# Altium PCB PCB1.PcbDoc
Units mm, origin at the board's own origin, x right, y up, seen from the top; angles counter-clockwise.
Board outline 38.5 x 62.7 mm, 4 copper layers (Top Layer, Mid Layer 1, Mid Layer 2, Bottom Layer), stack 1.57 mm thick; 33 components, 31 nets, 138 pads, 57 vias.
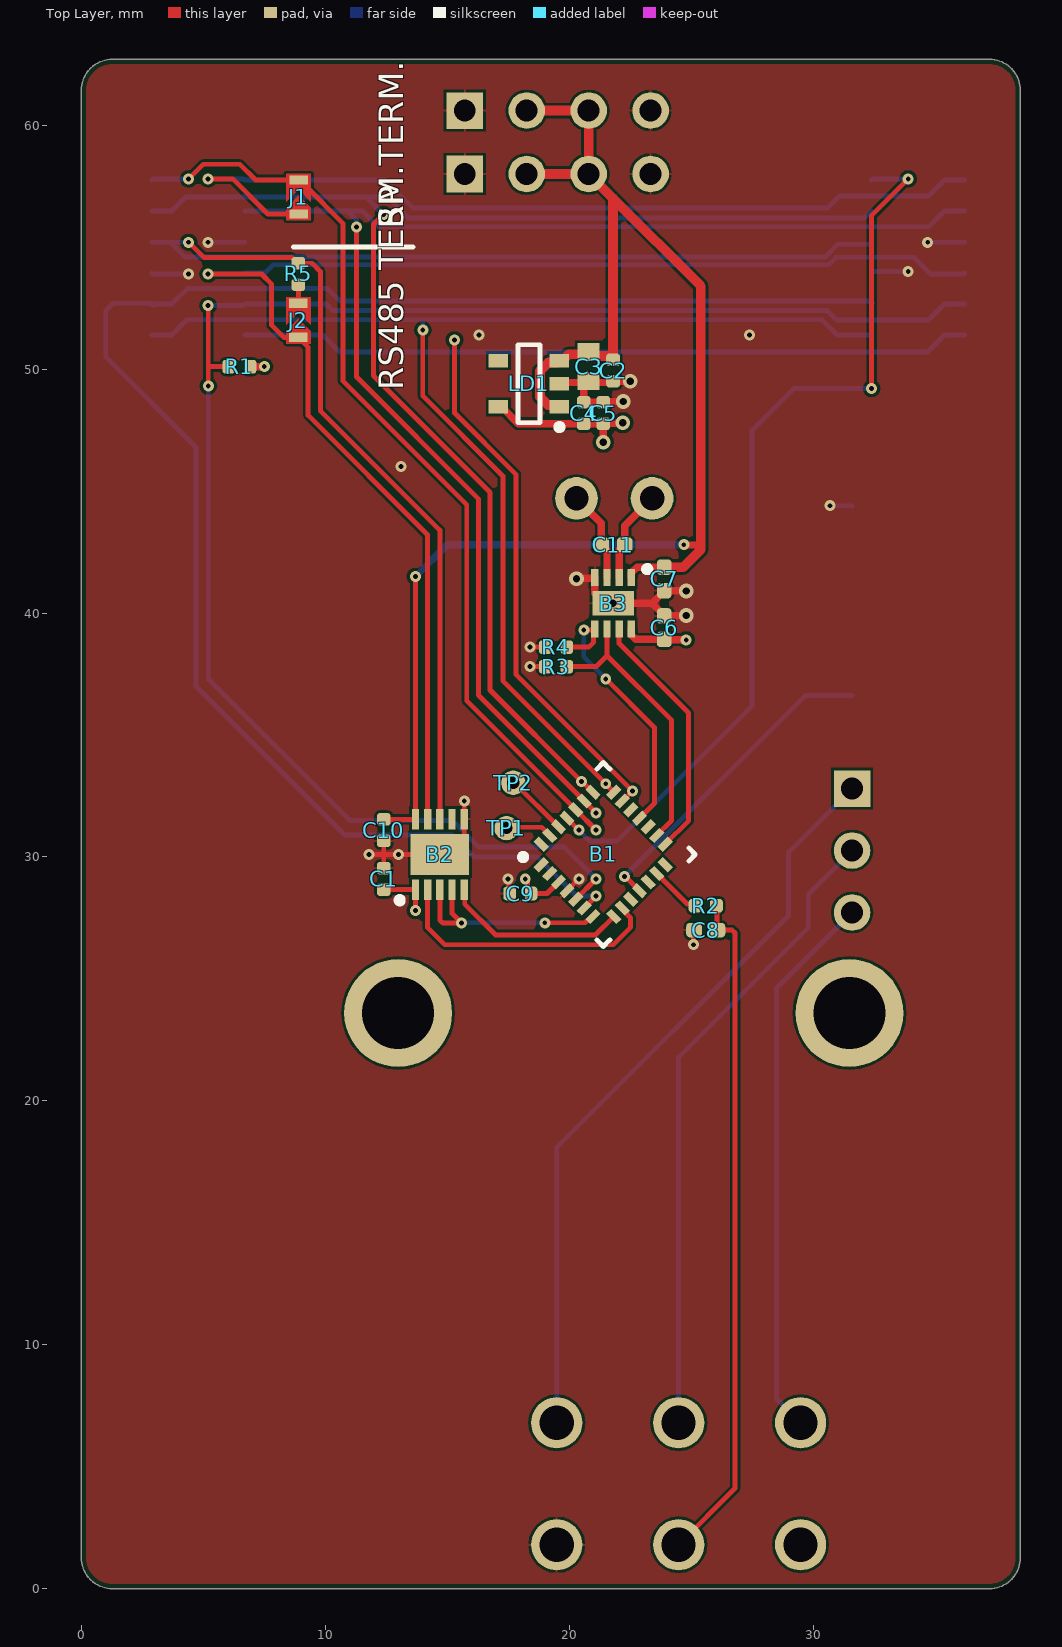
[diagram p0: Top Layer view]
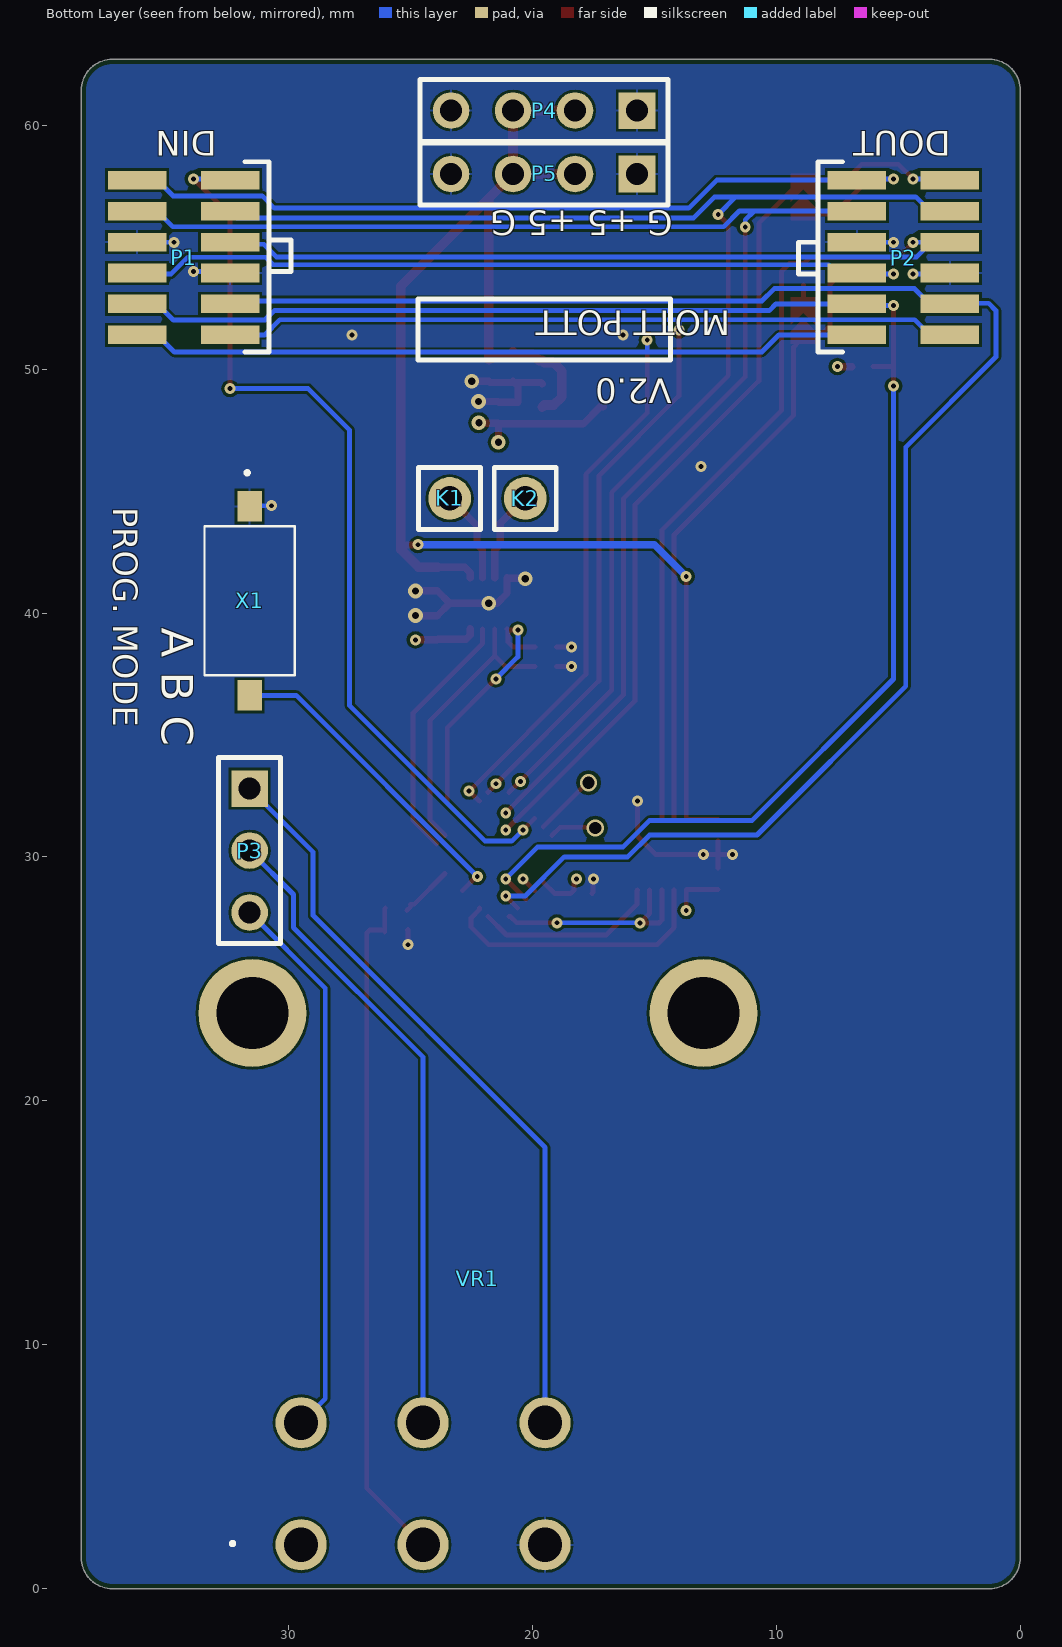
[diagram p1: Bottom Layer view, seen from below]
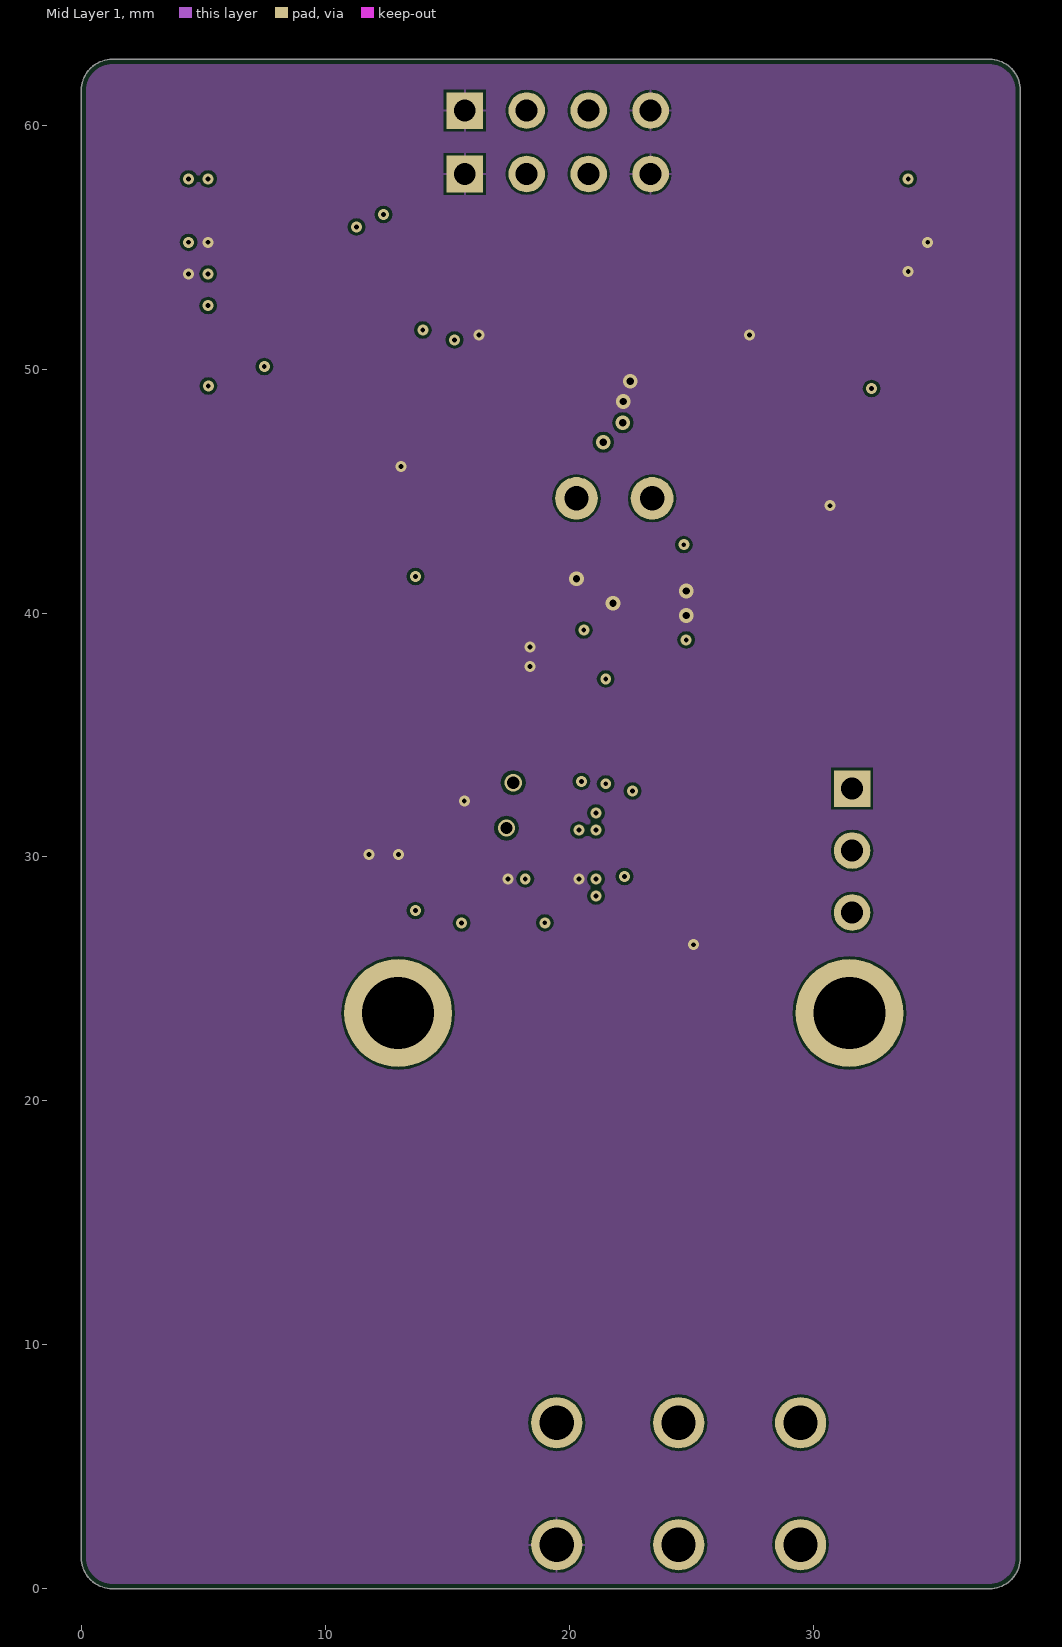
[diagram p2: Mid Layer 1]
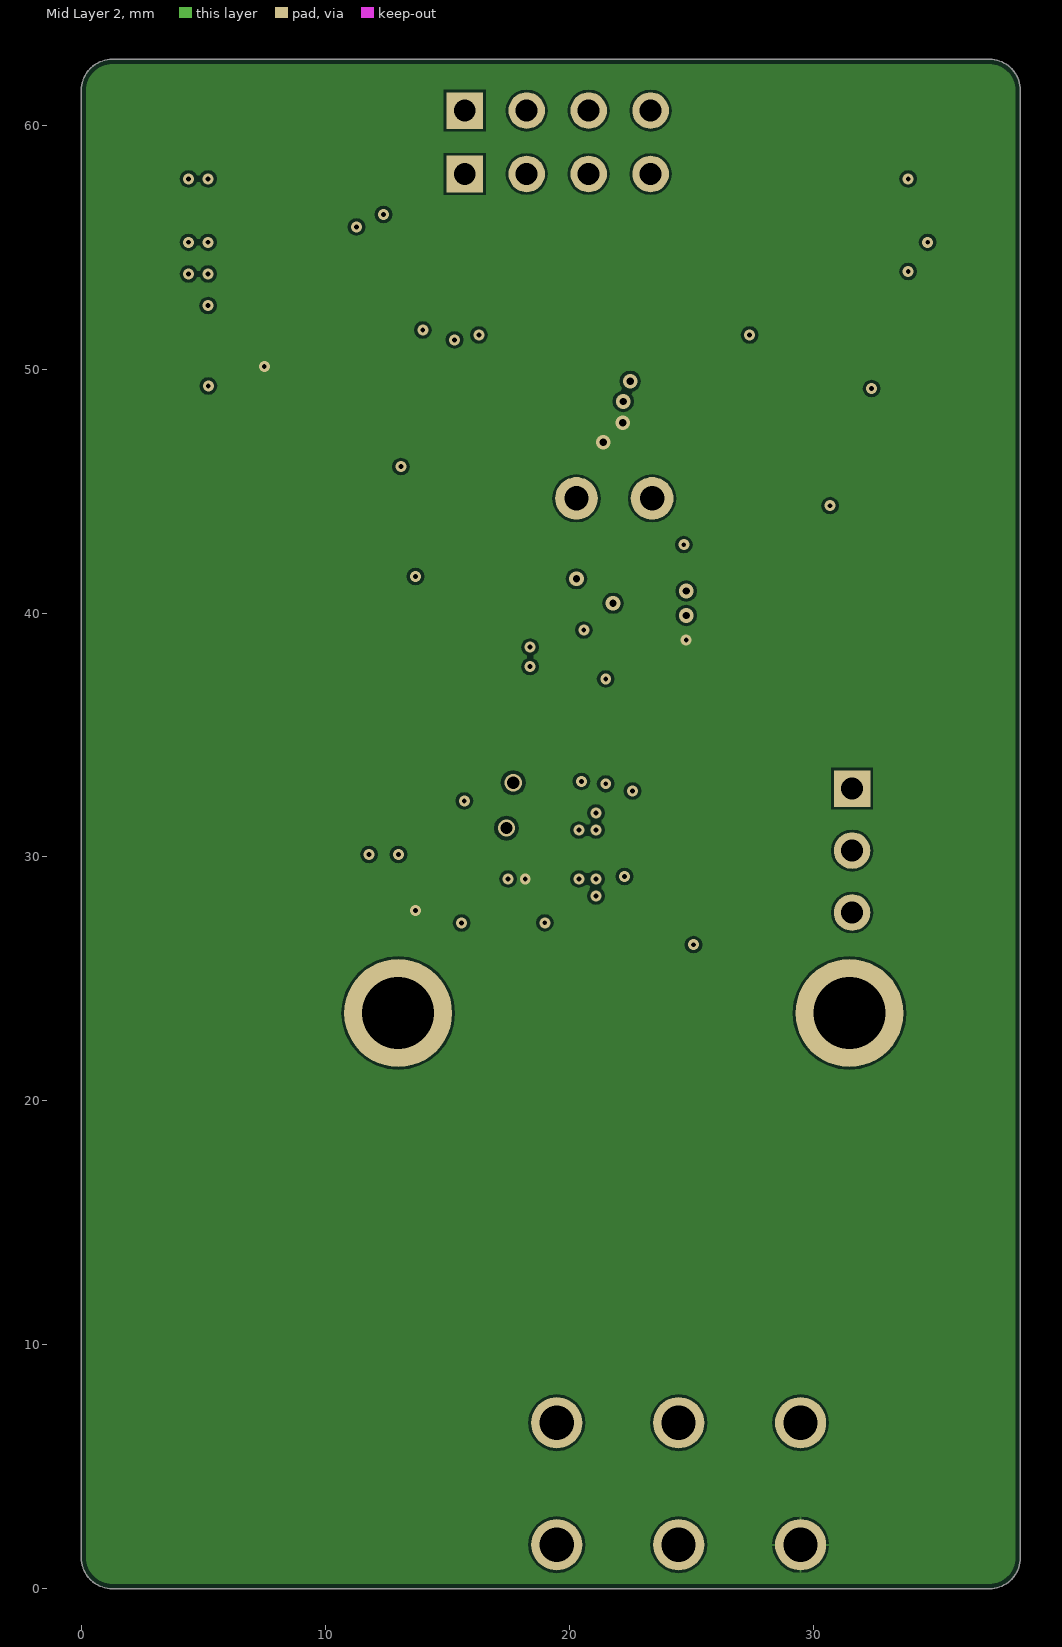
[diagram p3: Mid Layer 2]
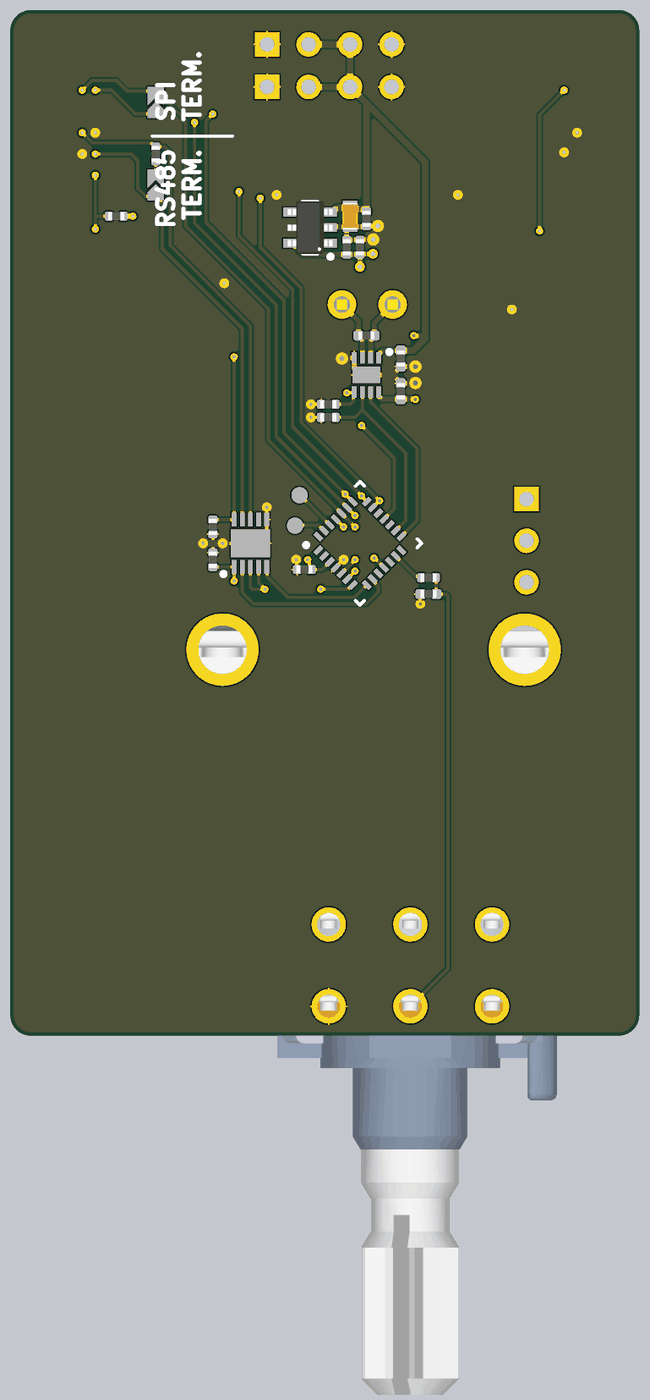
[diagram p4: 3D render of the assembled board from above, using the file's embedded part models]

## Layer stack, top to bottom
Top Solder: solder mask 0.0127, Solder Resist, Dk 3.8
Top Layer: signal copper 0.035
Dielectric 1: prepreg 0.2, 7628, Dk 4.6
Mid Layer 1: signal copper 0.0175
Core: core 1.065, FR-4, Dk 4.5
Mid Layer 2: signal copper 0.0175
Dielectric 2: prepreg 0.2, 7628, Dk 4.6
Bottom Layer: signal copper 0.035
Bottom Solder: solder mask 0.0127, Solder Resist, Dk 3.8

## Board outline
0,1.27 0,61.43 cw(c1.27,61.43) 1.27,62.7 37.23,62.7 cw(c37.23,61.43) 38.5,61.43 38.5,1.27 cw(c37.23,1.27) 37.23,0 1.27,0 cw(c1.27,1.27)

## Design rules (kind name [scope] priority, off if disabled: settings)
BoardOutlineClearance [All] p1: gap=0.2 ignorepadtopadclearanceinfootprint=FALSE
Clearance [All] p1: gap=0.102 ignorepadtopadclearanceinfootprint=FALSE except(0.127: Arc-Via Track-Via SMDPad-Via THPad-Via Via-Via Via-Fill Via-Poly Via-Region Via-Text; 0.25: Arc-Hole Track-Hole SMDPad-Hole THPad-Hole Via-Hole Fill-Hole Poly-Hole Region-Hole Text-Hole)
ComponentClearance [All] p1: gap=0.102 collisioncheckmode=3 verticalgap=0.102 showdistances=TRUE
DiffPairsRouting [All] p1: maxlimit=0.102 minlimit=0.102 mostfreqgap=0.102 toplayer_minwidth=0.102 toplayer_maxwidth=1816.048 toplayer_prefwidth=0.102 midlayer1_minwidth=0.102 midlayer1_maxwidth=1816.048 midlayer1_prefwidth=0.102 midlayer2_minwidth=0.102 midlayer2_maxwidth=1816.048 midlayer2_prefwidth=0.102 bottomlayer_minwidth=0.102 bottomlayer_maxwidth=1816.048 bottomlayer_prefwidth=0.102 maxuncoupledlength=12.7
Height [All] p1: minheight=0 maxheight=1816.048 prefheight=12.7
HoleSize [All] p1: absolutevalues=TRUE maxlimit=6.3 minlimit=0.2 maxpercent=80.000 minpercent=20.000
HoleToHoleClearance [All] p1: gap=0.25 allowstackedmicrovias=FALSE
MinimumAnnularRing [All] p1: minimumring=0.076
MinimumSolderMaskSliver [All] p1: minsoldermaskwidth=0
PlaneClearance [All] p1: clearance=0.102
PlaneConnect PlaneConnectPowerPads [InPadClass('PowerPads')] p1: planeconnectstyle=Direct reliefexpansion=0.508 reliefentries=4 reliefconductorwidth=0.254 reliefairgap=0.254
PlaneConnect [All] p2: pad.planeconnectstyle=Relief pad.reliefexpansion=0.3 pad.reliefentries=4 pad.reliefconductorwidth=0.102 pad.reliefairgap=0.102 via.planeconnectstyle=Direct via.reliefexpansion=0.3 via.reliefentries=4 via.reliefconductorwidth=0.127 via.reliefairgap=0.127
PolygonConnect PolygonConnectPowerPads [All vs (InPadClass('PowerPads'))] p1: connectstyle=Direct reliefconductorwidth=0.254 reliefentries=4 polygonreliefangle="90 Angle" airgapwidth=0.254
PolygonConnect [All] p2: thpad.connectstyle=Relief thpad.reliefconductorwidth=0.102 thpad.reliefentries=4 thpad.polygonreliefangle="90 Angle" thpad.airgapwidth=0.102 smdpad.connectstyle=Relief smdpad.reliefconductorwidth=0.102 smdpad.reliefentries=4 smdpad.polygonreliefangle="90 Angle" smdpad.airgapwidth=0.102 via.connectstyle=Direct via.reliefconductorwidth=0.127 via.reliefentries=4 via.polygonreliefangle="90 Angle" via.airgapwidth=0.127
RoutingVias [All] p1: holewidth=0.2 width=0.45 viastyle="Through Hole" minholewidth=0.2 minwidth=0.45 maxholewidth=6.3 maxwidth=6.55
SilkToSilkClearance [All] p1: silktosilkclearance=0
SilkToSolderMaskClearance [IsPad] p1: minsilkscreentomaskgap=0.102 clearancetoexposedcopper=TRUE
SolderMaskExpansion [All] p1: expansion=0.075 istentingtop=FALSE
Width [All] p1: maxlimit=1816.048 minlimit=0.102 preferedwidth=0.102
20 further rules are at their usual default settings.

## Classes and differential pairs
component class U_Power: C2 C3 C4 C5 LD1 P4 P5
component class U_Motor: B3 C6 C7 C8 C11 K1 K2 P3 R2 R3 R4 VR1
component class U_MCU: B1 B2 C1 C9 C10 J1 J2 P1 P2 R1 R5 TP1 TP2 X1

## Components (designator, comment, footprint, x,y, rotation, side; value= is the part's Value field where it differs from the comment)
B1 "STM32C031G6U6" QFN50P400X400X60-28N-D 21.4,30.1 r45 top
B2 "XR33202EEHBTR-F" SON50P300X300X80-11N-D 14.7,30.1 r90 top
B3 "DRV8837DSGR" SON50P200X200X80-9N 21.8,40.4 r270 top
C1 "100n" R1005_0402i_L 12.4,29.1 r90 top
C2 "100n" R1005_0402i_L 21.8,49.94 r270 top
C3 "22u" C1608_0603I_L 20.8,50.1 r270 top
C4 "1u" R1005_0402i_L 20.6,48.2 r90 top
C5 "100n" R1005_0402i_L 21.4,48.2 r90 top
C6 "100n" R1005_0402i_M 23.9,39.4 r270 top
C7 "100n" R1005_0402i_M 23.9,41.4 r270 top
C8 "100n" R1005_0402i_M 25.6,27 r180 top
C9 "100n" R1005_0402i_L 18,28.5 r180 top
C10 "100n" R1005_0402i_L 12.4,31.1 r270 top
C11 "100n" R1005_0402i_M 21.8,42.8 r0 top
J1 "solder_jumper" solder_jumper_triangle 8.4,57.5 r270 top
J2 "solder_jumper" solder_jumper_triangle 8.392,52.446 r270 top
K1 "H1x1" H1x1 23.4,44.7 r180 bottom
K2 "H1x1" H1x1 20.3,44.7 r180 bottom
LD1 "NCP115 3.3V" TSOP95P280X110-6L 18.35,49.4 r180 top
P1 "Input" "1.27mm SMD conn" 34.305,54.575 r90 bottom
P2 "Output" "1.27mm SMD conn" 4.795,54.575 r90 bottom
P3 "Header 3" HDR1X3 31.6,32.8 r270 bottom
P4 "Header 4" HDR1X4 15.72,60.6 r0 bottom
P5 "Header 4" HDR1X4 15.72,58 r0 bottom
R1 "100k" R1005_0402i_L 6.479,50.1 r180 top
R2 "1k" R1005_0402i_L 25.6,28 r0 top
R3 "100k" R1005_0402i_L 19.46,37.8 r180 top
R4 "100k" R1005_0402i_L 19.46,38.6 r180 top
R5 "120" R1005_0402i_L 8.9,53.9 r90 top
TP1 "PAD" PAD 17.43,31.182 r315 top
TP2 "PAD" PAD 17.706,33.042 r315 top
VR1 "PRM162-K420K-103B1" PRM162K415K103B1 29.49,1.8 r270 bottom locked
X1 "PTS636_SM25_SMTR_LFS" PTS636SM25SMTRLFS 31.6,40.5 r270 bottom

## Footprints (in the part's own frame and the unit in brackets; to place one, negate y for a bottom-side part, rotate by r counter-clockwise, add the part's x,y. Pads: shape width x height; smd on the part's side, far side on the other; paste and mask are expansions set on the pad)
"1.27mm SMD conn" [mm]
  rect 0.76x2.4 smd: 1(3.175,1.905) 2(3.175,-1.905) 3(1.905,1.905) 4(1.905,-1.905) 5(0.635,1.905) 6(0.635,-1.905) 7(-0.635,1.905) 8(-0.635,-1.905) 9(-1.905,1.905) 10(-1.905,-1.905) 11(-3.175,1.905) 12(-3.175,-1.905)
C1608_0603I_L [mm] "Chip Capacitor, 2-Leads, Body 1.57x0.85mm, IPC High Density"
  rect 0.72x0.9 smd: 1(-0.6,0) 2(0.6,0)
  body extent -0.82,-0.48 0.83,0.48, height 0.95
H1x1 [mm]
  round 1.75 hole 1: 1(0,0)
  silkscreen extent -1.27,-1.27 1.27,1.27, body extent -1.27,-1.27 1.27,1.27, height 8.4
HDR1X3 [mm] "Connector; Header; 3 Position"
  rect 1.5x1.5 hole 0.9: 1(0,0)
  round 1.5 hole 0.9: 2(2.54,0) 3(5.08,0)
  silkscreen extent -1.27,-1.27 6.35,1.27
HDR1X4 [mm] "Connector; Header; 4 Position"
  rect 1.5x1.5 hole 0.9: 1(0,0)
  round 1.5 hole 0.9: 2(2.54,0) 3(5.08,0) 4(7.62,0)
  silkscreen extent -1.27,-1.27 8.89,1.27
PAD [mm]
  round 1 smd: 1(0,0)
PRM162K415K103B1 [mm]
  round 2.1 hole 1.4: 1(0,0) 2(0,5) 3(0,10) 4(-5,0) 5(-5,5) 6(-5,10)
  round 4.425 hole 2.95: MH1(-21.8,-2) MH2(-21.8,16.5)
  silkscreen extent -0.1,-2.86 0,-2.76, body extent -44.59,-6.99 23.76,27.64, height 28.44
PTS636SM25SMTRLFS [mm]
  rect 1.25x1 smd: 1(-3.875,0) 2(3.875,0)
  silkscreen extent -5.3,-1.85 3.05,1.85
QFN50P400X400X60-28N-D [mm]
  rect 0.6x0.3 smd: 1(-2.1,1.5) 2(-2.1,1) 3(-2.1,0.5) 4(-2.1,0) 5(-2.1,-0.5) 6(-2.1,-1) 7(-2.1,-1.5) 15(2.1,-1.5) 16(2.1,-1) 17(2.1,-0.5) 18(2.1,0) 19(2.1,0.5) 20(2.1,1) 21(2.1,1.5)
  rect 0.3x0.6 smd: 8(-1.5,-2.1) 9(-1,-2.1) 10(-0.5,-2.1) 11(0,-2.1) 12(0.5,-2.1) 13(1,-2.1) 14(1.5,-2.1) 22(1.5,2.1) 23(1,2.1) 24(0.5,2.1) 25(0,2.1) 26(-0.5,2.1) 27(-1,2.1) 28(-1.5,2.1)
  silkscreen extent -2.67,-2.67 2.67,2.67
R1005_0402i_L [mm] "Resistor, Chip; 1.00 mm L X 0.50 mm W X 0.40 mm H body"
  rrect50% 0.52x0.56 smd: 1(-0.44,0) 2(0.44,0)
  body extent -0.5,-0.25 0.5,0.25, height 0.4
R1005_0402i_M [mm] "Resistor, Chip; 1.00 mm L X 0.50 mm W X 0.40 mm H body"
  rrect50% 0.64x0.6 smd: 1(-0.48,0) 2(0.48,0)
  body extent -0.5,-0.25 0.5,0.25, height 0.4
solder_jumper_triangle [mil]
  rect 15x30 smd paste+0 mask+0: 1(45,20) 2(-10,20)
  Top Layer region: 5,20 25,40 -20,40 -20,0 25,0
  Top Layer region: 55,40 35,40 15,20 35,0 55,0
SON50P200X200X80-9N [mm]
  rect 0.7x0.3 smd: 1(-1.05,0.75) 2(-1.05,0.25) 3(-1.05,-0.25) 4(-1.05,-0.75) 5(1.05,-0.75) 6(1.05,-0.25) 7(1.05,0.25) 8(1.05,0.75)
  rect 1x1.7 smd: 9(0,0)
  silkscreen extent -1.52,1.28 -1.28,1.53
SON50P300X300X80-11N-D [mm]
  rect 0.85x0.3 smd: 1(-1.45,1) 2(-1.45,0.5) 3(-1.45,0) 4(-1.45,-0.5) 5(-1.45,-1) 6(1.45,-1) 7(1.45,-0.5) 8(1.45,0) 9(1.45,0.5) 10(1.45,1)
  rect 1.7x2.4 smd: 11(0,0)
  silkscreen extent -2,1.52 -1.75,1.77
TSOP95P280X110-6L [mm] "TSOP, 6-Leads, Body 2,87x1,50mm, Pitch 0,95mm, IPC High Density"
  rect 0.8x0.55 smd: 1(-1.25,0.95) 2(-1.25,0) 3(-1.25,-0.95) 4(1.25,-0.95) 5(1.25,0.95)
  silkscreen extent -1.38,-1.6 0.45,1.9, body extent -1.38,-1.6 1.38,1.6, height 1.1

## Part data
B1: "Mainstream Arm Cortex-M0+ MCU with 32 Kbytes of Flash memory, 12 Kbytes RAM, 48 MHz CPU, 2x USART, timers, ADC, comm. I/F, 2-3.6V", Manufacturer_Name=STMicroelectronics, Mouser Part Number=511-STM32C031G6U6, Datasheet Link=https://www.st.com/resource/en/datasheet/stm32c031c4.pdf, Geometry.Height=0.6mm, Manufacturer_Part_Number=STM32C031G6U6, Mouser Price/Stock=https://www.mouser.co.uk/ProductDetail/STMicroelectronics/STM32C031G6U6?qs=IPgv5n7u5QZqRf3nOTChhw%3D%3D
B2: "RS-422/RS-485 Interface IC Wide Supply Trans with I/O Interface", Manufacturer_Name="MaxLinear, Inc.", Mouser Part Number=701-XR33202EEHBTR-F, Datasheet Link=https://www.maxlinear.com/ds/xr33202.pdf, Geometry.Height=0.8mm, Manufacturer_Part_Number=XR33202EEHBTR-F, Mouser Price/Stock=https://www.mouser.co.uk/ProductDetail/MaxLinear/XR33202EEHBTR-F?qs=GtWAI9k6EVi4nRW8bj1LFw%3D%3D
B3: "1.8A Low Voltage Brushed DC Motor Driver (PWM Ctrl)", Manufacturer_Name="Texas Instruments", Mouser Part Number=595-DRV8837DSGR, Datasheet Link=http://www.ti.com/lit/gpn/drv8837, Geometry.Height=0.8mm, Manufacturer_Part_Number=DRV8837DSGR, Mouser Price/Stock=https://www.mouser.co.uk/ProductDetail/Texas-Instruments/DRV8837DSGR?qs=l6ZoeTYLMwO0pKIJ8222Ww%3D%3D
C1 C2 C3 C4 C5 C6 C7 C8 C9 C10 C11: library part C, "Capacitor"
K1 K2: "Header 1x1 (male)"
P1 P2: library part "Header 6X2", "Header, 6-Pin, Dual row", LatestRevisionDate=17-Jul-2002, LatestRevisionNote="Re-released for DXP Platform.", Publisher="Altium Limited"
P3: "Header, 3-Pin", LatestRevisionDate=17-Jul-2002, LatestRevisionNote="Re-released for DXP Platform.", Publisher="Altium Limited"
P4 P5: "Header, 4-Pin", LatestRevisionDate=17-Jul-2002, LatestRevisionNote="Re-released for DXP Platform.", Publisher="Altium Limited"
R1 R2 R3 R4 R5: library part R, "R"
VR1: "Variable Resistor", Manufacturer_Name=Bourns, Mouser Part Number=652-PRM162K420K103B1, Arrow Part Number=PRM162-K420K-103B1, Arrow Price/Stock=https://www.arrow.com/en/products/prm162-k420k-103b1/bourns?region=nac, Datasheet Link=https://www.bourns.com/docs/product-datasheets/PDB18.pdf, Height=28.5mm, Manufacturer_Part_Number=PRM162-K420K-103B1, Mouser Price/Stock=https://www.mouser.co.uk/ProductDetail/Bourns/PRM162-K420K-103B1?qs=U%2FacTlguYxaZbpiLvzzeCA%3D%3D
X1: "Tactile Switches Tact 50mA 12VDC, 6.0x3.5, 2.5mm H, 180gf, G leads, No ground pin, White Actuator", Manufacturer_Name="C & K COMPONENTS", Manufacturer_Part_Number="PTS636 SM25 SMTR LFS", Mouser Part Number=611-PTS636SM25SMTRLF, Datasheet Link="https://componentsearchengine.com/Datasheets/1/PTS636 SM25 SMTR LFS.pdf", Geometry.Height=2.7mm, Mouser Price/Stock=https://www.mouser.co.uk/ProductDetail/CK/PTS636-SM25-SMTR-LFS?qs=vLWxofP3U2yIXR4iooxesw%3D%3D

## Via types
v1: diameter 0.45, hole 0.2, Top Layer to Bottom Layer, 47 vias
v2: diameter 0.6, hole 0.3, Top Layer to Bottom Layer, 8 vias
v3: diameter 0.7, hole 0.5, Top Layer to Bottom Layer, 2 vias

## Nets (pads, with @x,y where several pads share a name; then routed paths per layer and width w, separated by ;. In a path a pad name is that pad's centre, name@x,y a point inside that pad or via, vN(x,y) a via of type N, cw(c..) or ccw(c..) an arc to the next point about the centre after c; other vN are vias at no path point)
+3V3: B1.3 B2.1 B3.8 C1.1 C4.1 C5.1 C6.2 C9.1 LD1.5 R1.1 VR1.1 | length 13.5
  Top Layer w0.2: C1.1 13.69,28.66 B2.1 v1(13.7,27.8) ; v1(18.2,29.1) 18.2,29.032 18.299,28.934 18.299,28.641 C9.1 19.093,28.5 B1.3
  Top Layer w0.3: R1.1 v1(7.5,50.1) ; LD1.5 17.225,48.45 17.915,47.76 C4.1 C5.1 ; v2(21.4,47) C5.1 ; v2(22.2,47.8) 22.18,47.78 21.42,47.78 C5.1 ; B3.8 22.55,39.096 22.726,38.92 22.98,38.92 C6.2 23.91,38.91 24.79,38.91 v1(24.8,38.9)
A_N: B2.8 P1.6 P2.6 R5.2 | length 61.1
  Top Layer w0.2: v1(4.4,55.2) 5.017,54.583 8.621,54.583 8.864,54.34 9.46,54.34 9.8,54 9.8,48.3 14.7,43.4 B2.8
  Bottom Layer w0.2: P2.6 2.9,55.2 P2.6@3.658,55.2 ; v1(4.4,55.2) P2.6@3.658,55.2 ; P1.6 32.307,55.117 31.017,55.117 30.492,54.592 4.265,54.592 P2.6@3.658,55.2
B_P: B2.9 J2.1 P1.7 P2.7 | length 59.3
  Top Layer w0.2: v1(5.2,53.9) 7.385,53.9 7.8,53.485 7.8,51.8 8.297,51.303 J2.1 ; J2.1@9.017,51.303 9.108,51.212 9.108,51.095 9.3,50.903 9.3,48.1 14.2,43.2 B2.9
  Bottom Layer w0.2: v1(5.2,53.9) 6.66,53.9 P2.7 7.52,53.94 7.861,54.281 30.641,54.281 30.945,54.585 34.134,54.585 34.827,53.891 36.161,53.891 P1.7
BTN: B1.11 X1.2 | length 13.3
  Top Layer w0.2: v1(22.266,29.197) 22.303,29.197 B1.11
  Bottom Layer w0.2: v1(22.266,29.197) 29.694,36.625 X1.2
GND: B1.4 B2.6 B2.11 B3.4 B3.9 C1.2 C2.2 C3.2 C4.2 C5.2 C6.1 C7.2 C8.2 C9.2 C10.2 LD1.2 P1.5 P1.8 P2.5 P2.8 P4.1 P4.4 P5.1 P5.4 R3.2 R4.2 VR1.3 X1.1 | length 29.7
  Top Layer w0.2: v1(11.8,30.1) 12.4,30.1 ; C1.2 12.4,30.1 ; C10.2 12.4,30.1 ; v1(15.7,32.3) B2.6 15.7,30.85 14.95,30.1 B2.11 v1(13,30.1) 12.4,30.1 ; v1(17.5,29.1) 17.53,29.07 17.53,28.53 C9.2 ; v1(18.4,37.8) R3.2 ; v1(18.4,38.6) R4.2 ; B1.4 v1(20.4,29.1) ; v1(25.1,26.4) 25.1,27.02 C8.2
  Top Layer w0.3: LD1.2 19.65,49.45 20.6,49.45 C3.2@20.75,49.45 ; v2(20.3,41.4) 20.325,41.425 B3.4@21.05,41.425 ; C3.2 C3.2@20.75,49.45 ; B3.4 B3.4@21.05,41.425 ; v2(22.217,48.674) 21.434,48.674 C5.2 C4.2 20.6,49.3 C3.2@20.75,49.45 ; v2(22.5,49.5) C2.2 21.75,49.45 C3.2@20.75,49.45 ; v2(24.8,39.9) 24.79,39.89 23.91,39.89 C6.1 23.9,39.9 23.4,40.4 ; v2(24.8,40.9) 24.79,40.91 23.91,40.91 C7.2 23.9,40.9 23.4,40.4 ; B3.4@21.05,41.425 21.05,40.8 21.45,40.4 v2(21.8,40.4) 23.4,40.4
  Bottom Layer w0.2: P2.8 2.93,53.9 v1(4.4,53.9) ; v1(5.2,55.2) 6.69,55.2 P2.5 ; v1(30.7,44.4) 31.575,44.4 X1.1 ; P1.8 32.46,54 v1(33.9,54) ; v1(34.7,55.2) 36.2,55.2 P1.5
  other v1: 13.1,46 16.3,51.4 27.4,51.4
INT: B1.6 P1.10 P2.10 | length 69.8
  Top Layer w0.2: B1.6 20.622,27.915 21.1,28.393 v1(21.1,28.4)
  Bottom Layer w0.2: P2.10@2.96,52.6 P2.10 3.3,52.67 3.71,52.67 4.34,53.3 10.093,53.3 10.594,52.798 32.272,52.798 P1.10 P1.10@32.43,52.7 ; P2.10@2.96,52.7 2.89,52.7 1.3,52.7 1,52.4 1,50.5 4.7,46.8 4.7,37 10.8,30.9 15.2,30.9 16.1,30 18.7,30 20.3,28.4 v1(21.1,28.4)
MISO: J1.1 P1.1 P2.1 | length 36.3
  Top Layer w0.2: v1(5.2,57.8) 6.2,57.8 7.643,56.357 J1.1
  Bottom Layer w0.2: v1(5.2,57.8) 6.65,57.8 P2.1 12.45,57.75 13.6,56.6 30.589,56.6 31.089,57.1 34.74,57.1 35.39,57.75 P1.1
MISO_MCU: B1.24 J1.2 P2.2 | length 39.6
  Top Layer w0.2: v1(4.4,57.8) 5,58.4 6.5,58.4 7.146,57.754 9.098,57.754 9.189,57.663 9.189,57.511 10.721,55.979 10.721,49.514 15.8,44.435 15.8,36.4 20.267,31.933 v1(21.1,31.1) 21.1,31.104 20.269,31.935 B1.24
  Bottom Layer w0.2: P2.2 2.94,57.8 v1(4.4,57.8)
MOSI_MCU: B1.25 P1.2 | length 37.9
  Top Layer w0.2: B1.25 v1(20.4,31.1) ; v1(32.4,49.2) 32.4,56.3 v1(33.9,57.8)
  Bottom Layer w0.2: v1(20.4,31.1) 20.852,30.648 21.948,30.648 27.5,36.2 27.5,47.5 29.2,49.2 v1(32.4,49.2) ; P1.2 32.45,57.8 v1(33.9,57.8)
NetB1_13: B1.13 R2.1 | length 2.2
  Top Layer w0.2: B1.13 24.853,28.061 R2.1@25.002,28.061 ; R2.1@25.002,27.961 25.16,27.804 R2.1@25.16,27.8
NetB1_15: B1.15 B3.7 | length 10.4
  Top Layer w0.2: B3.7 22.05,38.75 24.9,35.9 24.9,31.489 23.946,30.535 B1.15
NetB1_16: B1.16 B3.6 R3.1 | length 11.7
  Top Layer w0.2: R3.1 21.1,37.8 21.55,38.25 ; B3.6 21.55,38.25 ; B1.16 23.592,30.885 24.2,31.493 24.2,35.6 21.55,38.25
NetB1_18: B1.18 B3.5 R4.1 | length 11.3
  Top Layer w0.2: R4.1 20.8,38.6 21,38.8 B3.5@21,39.3 ; v1(20.6,39.3) B3.5@21,39.3 ; B3.5 B3.5@21,39.3 ; v1(21.5,37.3) 23.5,35.3 23.5,32.2 B1.18
  Bottom Layer w0.2: v1(20.6,39.3) 20.6,38.2 v1(21.5,37.3)
NetB1_26: B1.26 TP2.1 | length 2.6
  Top Layer w0.2: v3(17.706,33.042) 17.751,33.042 B1.26
NetB1_27: B1.27 TP1.1 | length 1.7
  Top Layer w0.2: TP1.1@17.693,31.215 18.871,31.215 B1.27
  other v3: 17.43,31.182
NetB3_2: B3.2 C11.2 K1.1 | length 3.8
  Top Layer w0.3: B3.2 22.05,42.59 22.26,42.8 C11.2 22.28,43.58 K1.1
NetB3_3: B3.3 C11.1 K2.1 | length 3.8
  Top Layer w0.3: K2.1 21.32,43.68 C11.1 21.34,42.8 21.49,42.65 21.49,42.63 21.55,42.57 B3.3
NetC8_1: C8.1 R2.2 VR1.2 | length 27.8
  Top Layer w0.2: VR1.2 26.8,4.11 26.8,26.883 26.683,27 C8.1 ; R2.2@26.04,27.9 26.06,27.88 C8.1@26.06,26.92
NetJ2_2: J2.2 R5.1 | length 0.8
  Top Layer w0.2: J2.2 R5.1
NetP3_1: P3.1 VR1.6 | length 31
  Bottom Layer w0.2: VR1.6 19.49,18.09 29,27.6 29,30.2 P3.1
NetP3_2: P3.2 VR1.5 | length 26.4
  Bottom Layer w0.2: VR1.5 24.49,21.79 29.8,27.1 29.8,28.46 P3.2
NetP3_3: P3.3 VR1.4 | length 22.6
  Bottom Layer w0.2: VR1.4 28.5,7.79 28.5,24.62 P3.3
R\E\S\E\T\: B1.5 P1.9 P2.9 R1.2 | length 68.2
  Top Layer w0.2: v1(5.2,52.6) 5.202,52.598 5.202,50.1 ; v1(5.204,49.31) 5.202,49.312 5.202,50.1 ; R1.2 5.202,50.1 ; B1.5 20.269,28.265 21.1,29.096 v1(21.1,29.1)
  Bottom Layer w0.2: v1(5.2,52.6) 6.63,52.6 P2.9 10.03,52.67 10.302,52.398 30.587,52.398 30.973,52.012 34.732,52.012 35.39,52.67 P1.9 ; v1(5.204,49.31) 5.204,37.296 11,31.5 15.2,31.5 16.3,30.4 19.8,30.4 v1(21.1,29.1)
RS485_DE: B1.7 B2.3 B2.4 | length 9.2
  Top Layer w0.2: B2.3 14.7,27.408 14.817,27.291 v1(15.591,27.291) 15.2,27.681 B2.4 ; v1(19,27.3) 20.651,27.3 20.905,27.554 B1.7
  Bottom Layer w0.2: v1(15.591,27.291) 15.6,27.3 v1(19,27.3)
RS485_RX: B1.9 B2.2 | length 11.4
  Top Layer w0.2: B2.2 14.2,27.1 14.9,26.4 21.8,26.4 22.517,27.117 22.517,27.498 22.178,27.837 B1.9
RS485_TX: B1.8 B2.5 | length 7.5
  Top Layer w0.2: B2.5 15.717,28.633 15.717,28.068 16.985,26.8 21.07,26.8 B1.8
S\S\: B1.22 P1.4 P2.4 | length 58.8
  Top Layer w0.2: v1(12.39,56.338) 11.979,55.928 11.979,49.725 16.756,44.949 16.756,36.844 v1(20.5,33.1) 20.511,33.1 20.965,32.646 B1.22
  Bottom Layer w0.2: P2.4 3.71,56.48 4.292,57.062 11.666,57.062 ; v1(12.39,56.338) 11.666,57.062 ; P1.4 32.12,56.2 13.4,56.2 12.538,57.062 11.666,57.062
SCK: B1.23 P1.3 P2.3 | length 58.9
  Top Layer w0.2: v1(11.281,55.832) 11.281,49.681 16.276,44.685 16.276,36.638 B1.23 20.622,32.285 21.1,31.807 v1(21.1,31.8)
  Bottom Layer w0.2: P2.3 10.92,56.48 ; v1(11.281,55.832) 11.281,56.119 10.92,56.48 ; P1.3 35.39,56.48 34.744,55.834 12.166,55.834 11.52,56.48 10.92,56.48
SWCLK: B1.21 P1.12 P2.12 | length 52.6
  Top Layer w0.2: v1(14,51.6) 14,48.9 17.281,45.619 17.281,37.219 v1(21.5,33) 21.5,32.985 21.824,32.661 B1.21
  Bottom Layer w0.2: P2.12 3.71,51.4 4.333,52.023 14,52.023 ; v1(14,51.6) 14,52.023 ; P1.12 30.983,51.4 30.36,52.023 14,52.023
SWDIO: B1.20 P1.11 P2.11 | length 52.7
  Top Layer w0.2: v1(15.3,51.2) 15.3,48.206 17.816,45.691 17.816,37.484 v1(22.6,32.7) 22.593,32.7 22.185,32.292 B1.20
  Bottom Layer w0.2: P2.11 9.9,51.4 10.6,50.7 15.3,50.7 ; v1(15.3,51.2) 15.3,50.7 ; P1.11 35.39,51.4 34.69,50.7 15.3,50.7
"VCC 5V": B2.10 B3.1 C2.1 C3.1 C7.1 C10.1 LD1.1 LD1.3 P4.2 P4.3 P5.2 P5.3 | length 65.2
  Top Layer w0.2: C10.1 13.69,31.54 B2.10 v1(13.7,41.5)
  Top Layer w0.3: B3.1 22.55,41.65 22.78,41.88 C7.1 ; v1@24.71,42.79 25.21,42.79 25.4,42.6
  Top Layer w0.4: P5.2 P5.3 ; P4.2 P4.3 P5.3 ; LD1.1 19.525,48.525 19.134,48.525 18.8,48.859 18.8,49.927 19.148,50.275 19.525,50.275 LD1.3 19.725,50.35 19.982,50.607 20.707,50.607 C3.1 20.96,50.54 21.62,50.54 21.78,50.38 C2.1 21.8,50.54 21.8,57 ; C7.1 24.68,41.88 25.4,42.6 25.4,42.79 25.4,53.4 21.8,57 ; v1(24.7,42.8) v1@24.71,42.79 ; P5.3 P5.3@21,57.8 ; P5.3@21,57.8 21.8,57 ; P5.3@21,57.8 21.8,57
  Bottom Layer w0.3: v1(13.7,41.5) 15,42.8 v1(24.7,42.8)
pads on no net: B1.1 B1.2 B1.10 B1.12 B1.14 B1.17 B1.19 B1.28 B2.7 LD1.4 VR1.MH1 VR1.MH2

## Polygon pours and split planes (outlines as drawn)
GND on Top Layer "NONET_L-01_P-001" (solid, remove dead copper, pour order 0): 0,62.7 38.5,62.7 38.5,0 0,0
GND on Mid Layer 1 "NONET_L-01_P-001" (solid, remove dead copper, pour order 1): 0,62.7 38.5,62.7 38.5,0 0,0
+3V3 on Mid Layer 2 "NONET_L-01_P-001" (solid, remove dead copper, pour order 2): 0,62.7 38.5,62.7 38.5,0 0,0
GND on Bottom Layer "NONET_L-01_P-001" (solid, remove dead copper, pour order 3): 0,62.7 38.5,62.7 38.5,0 0,0

## Silkscreen, mask and mechanical layers (free items; w line width, h text height)
Top Overlay:
  lines w0.2: 8.7,55 13.6,55
  text "SPI TERM." at 13.2,55.8 h1 r90
  text "RS485 TERM." at 13.2,49.127 h1 r90
Bottom Overlay:
  lines w0.2: 7.3,50.7 8.3,50.7 8.3,51 8.3,53.9 ; 7.3,58.5 8.3,58.5 8.3,58.2 8.3,55.2 ; 14.341,52.275 14.341,52.875 ; 31.8,50.7 30.8,50.7 30.8,51 30.8,54 ; 31.8,58.5 30.8,58.5 30.8,58.2 30.8,55.3 ; 8.3,53.9 9.1,53.9 9.1,55.2 8.3,55.2 ; 8.3,53.9 8.3,55.2 ; 14.341,52.875 24.7,52.875 24.7,50.375 14.341,50.375 14.341,52.875 ; 30.8,54 30.8,55.3 ; 30.8,54 29.9,54 29.9,55.3 30.8,55.3
  text "DOUT" at 2.854,59.746 h1 r180
  text "DIN" at 32.954,59.746 h1 r180
  text "G +5 +5 G" at 14.25,56.5 h1 r180
  text "MOTT POTT" at 11.9,52.4 h1 r180
  text "V2.0" at 14.3,49.6 h1 r180
  text "PROG. MODE" at 37.2,44.342 h1 r90
  text "A B C" at 35.2,39.4 h1.3 r90
Mechanical 1:
  lines w0.2: 0,1.27 ccw(c1.27,1.27) 1.27,0 36.73,0 37.23,0 ccw(c37.23,1.27) 38.5,1.27 38.5,58.93 38.5,61.43 ccw(c37.23,61.43) 37.23,62.7 1.27,62.7 ccw(c1.27,61.43) 0,61.43 0,58.93 0,56.6 0,1.27